# EAGLE board ADXL337 Breakout-Panel-v10 (EAGLE 6.5.0), part 1 of 2
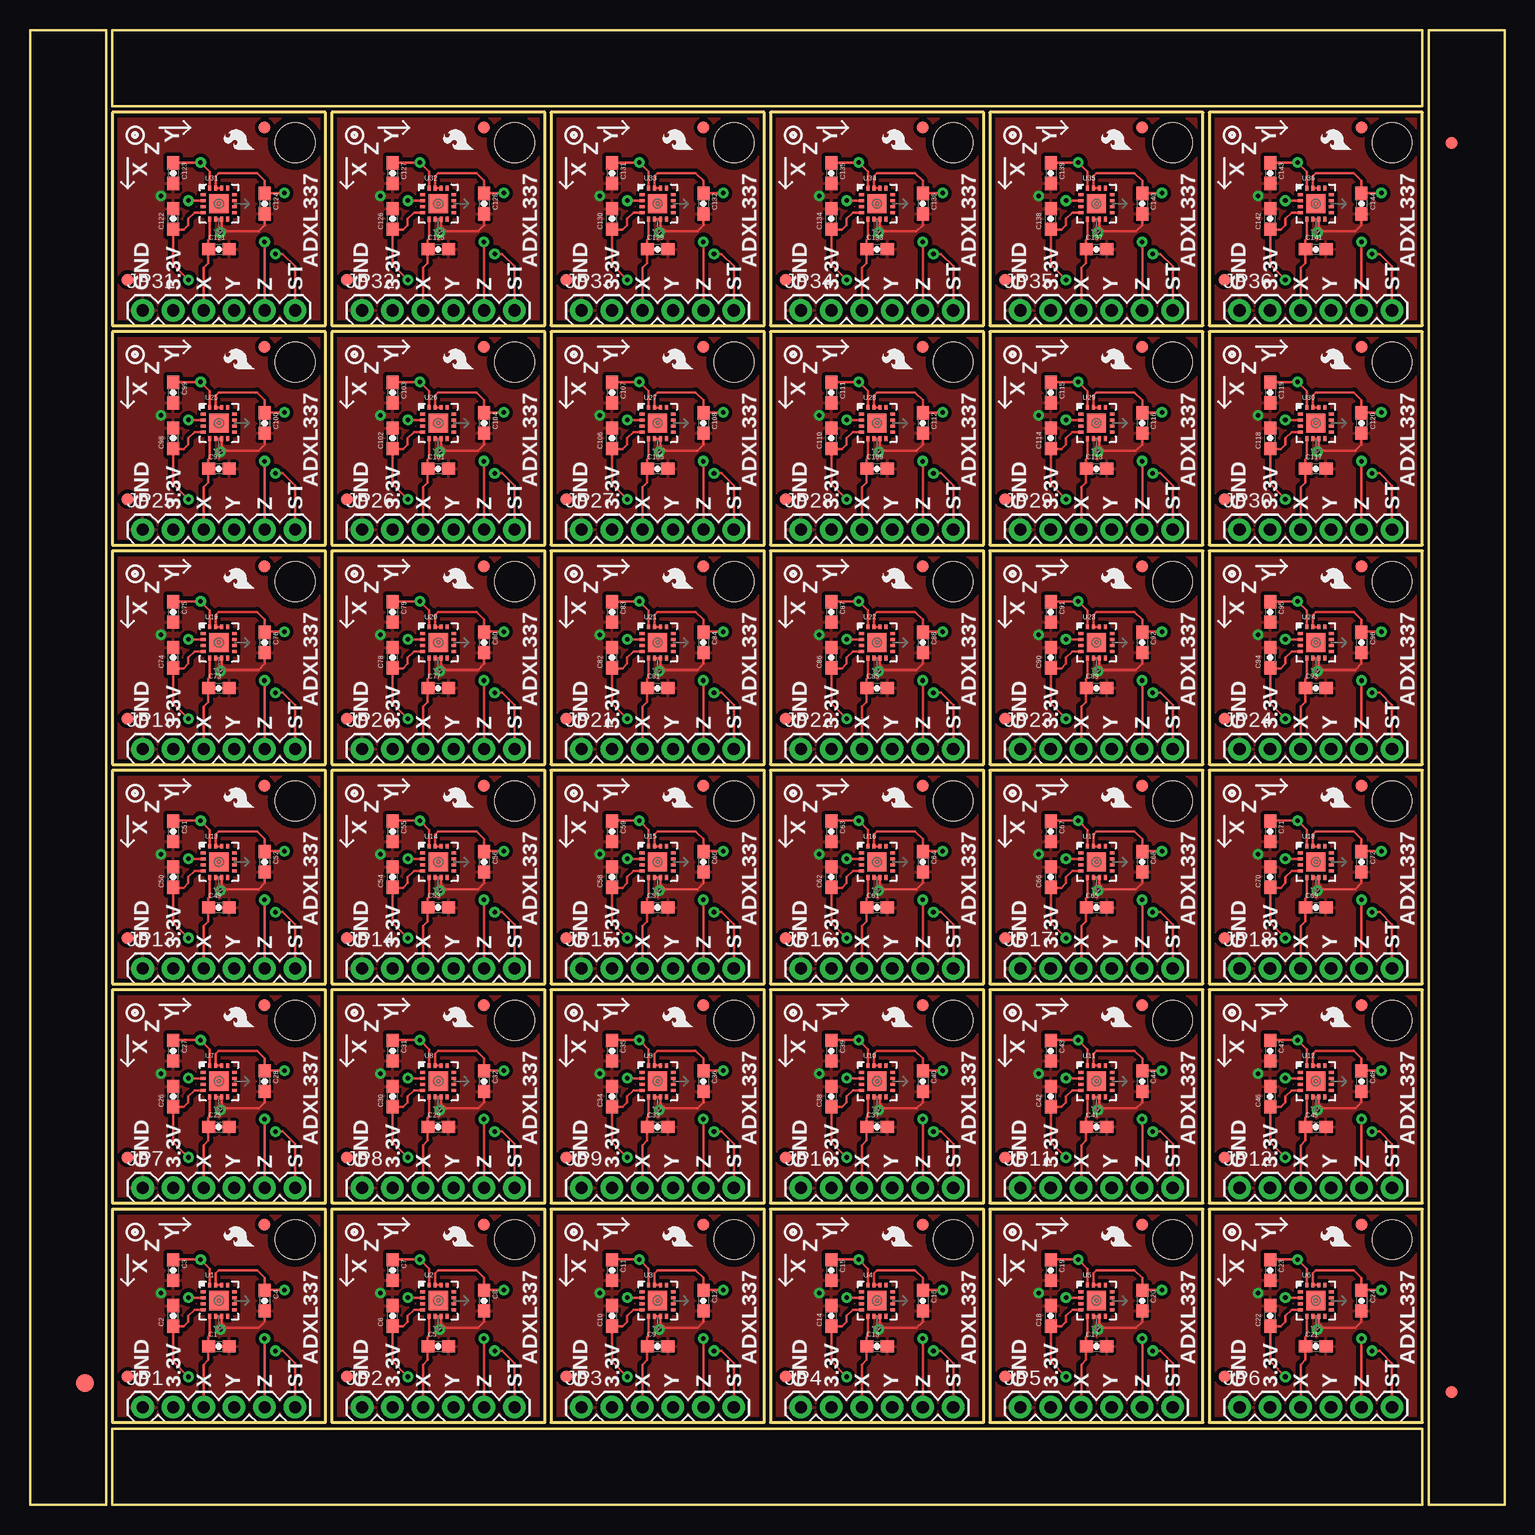
[diagram p0: board, top side]
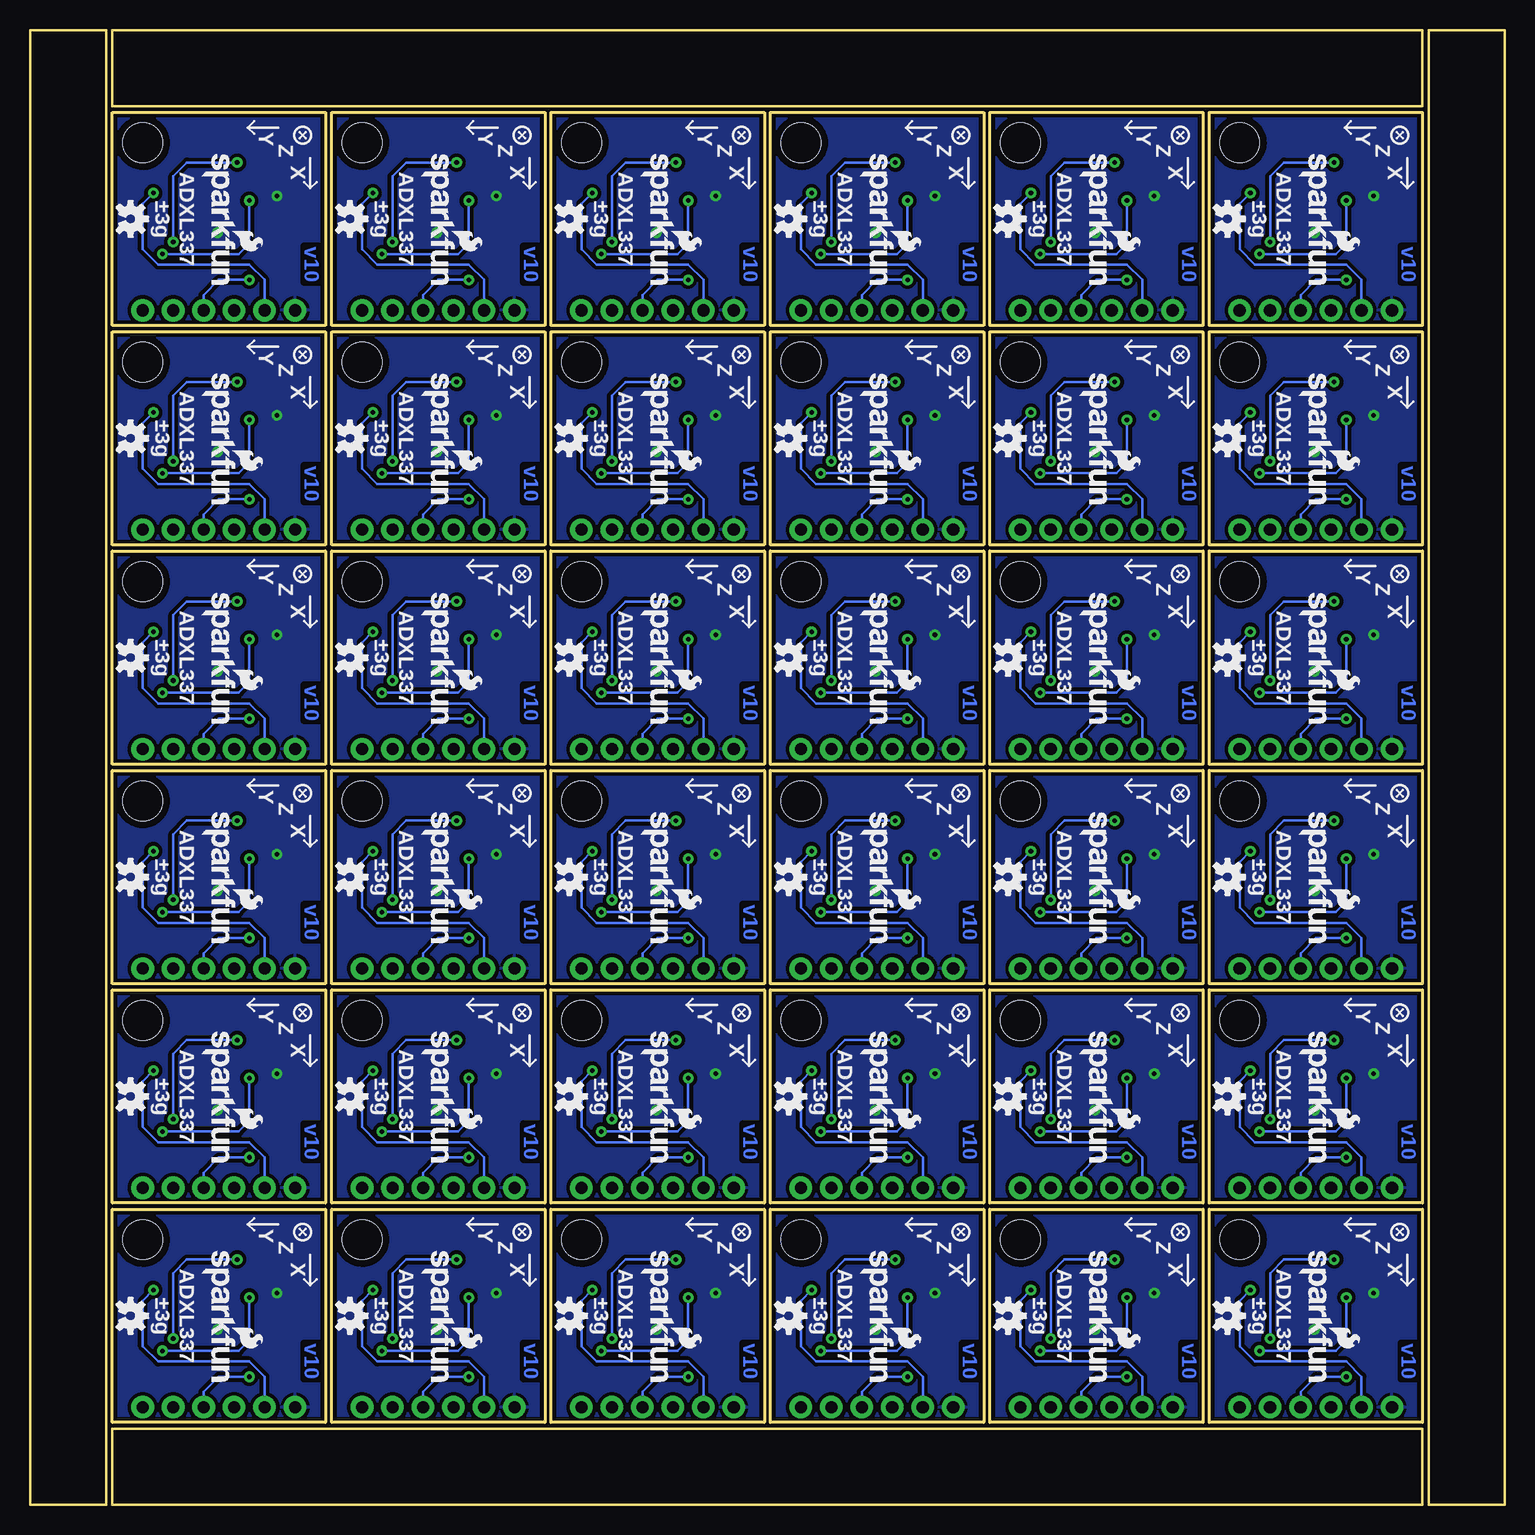
[diagram p1: board, bottom side, seen from below]

Size 122.94 x 122.94 mm. Coordinates in mm from the lower left corner, seen from the top.
Outline: 6.86,6.86 24.64,6.86 24.64,24.64 6.86,24.64 6.86,6.86
Outline: 25.15,6.86 42.93,6.86 42.93,24.64 25.15,24.64 25.15,6.86
Outline: 43.43,6.86 61.21,6.86 61.21,24.64 43.43,24.64 43.43,6.86
Outline: 61.72,6.86 79.5,6.86 79.5,24.64 61.72,24.64 61.72,6.86
Outline: 80.01,6.86 97.79,6.86 97.79,24.64 80.01,24.64 80.01,6.86
Outline: 98.3,6.86 116.08,6.86 116.08,24.64 98.3,24.64 98.3,6.86
Outline: 6.86,25.15 24.64,25.15 24.64,42.93 6.86,42.93 6.86,25.15
Outline: 25.15,25.15 42.93,25.15 42.93,42.93 25.15,42.93 25.15,25.15
Outline: 43.43,25.15 61.21,25.15 61.21,42.93 43.43,42.93 43.43,25.15
Outline: 61.72,25.15 79.5,25.15 79.5,42.93 61.72,42.93 61.72,25.15
Outline: 80.01,25.15 97.79,25.15 97.79,42.93 80.01,42.93 80.01,25.15
Outline: 98.3,25.15 116.08,25.15 116.08,42.93 98.3,42.93 98.3,25.15
Outline: 6.86,43.43 24.64,43.43 24.64,61.21 6.86,61.21 6.86,43.43
Outline: 25.15,43.43 42.93,43.43 42.93,61.21 25.15,61.21 25.15,43.43
Outline: 43.43,43.43 61.21,43.43 61.21,61.21 43.43,61.21 43.43,43.43
Outline: 61.72,43.43 79.5,43.43 79.5,61.21 61.72,61.21 61.72,43.43
Outline: 80.01,43.43 97.79,43.43 97.79,61.21 80.01,61.21 80.01,43.43
Outline: 98.3,43.43 116.08,43.43 116.08,61.21 98.3,61.21 98.3,43.43
Outline: 6.86,61.72 24.64,61.72 24.64,79.5 6.86,79.5 6.86,61.72
Outline: 25.15,61.72 42.93,61.72 42.93,79.5 25.15,79.5 25.15,61.72
Outline: 43.43,61.72 61.21,61.72 61.21,79.5 43.43,79.5 43.43,61.72
Outline: 61.72,61.72 79.5,61.72 79.5,79.5 61.72,79.5 61.72,61.72
Outline: 80.01,61.72 97.79,61.72 97.79,79.5 80.01,79.5 80.01,61.72
Outline: 98.3,61.72 116.08,61.72 116.08,79.5 98.3,79.5 98.3,61.72
Outline: 6.86,80.01 24.64,80.01 24.64,97.79 6.86,97.79 6.86,80.01
Outline: 25.15,80.01 42.93,80.01 42.93,97.79 25.15,97.79 25.15,80.01
Outline: 43.43,80.01 61.21,80.01 61.21,97.79 43.43,97.79 43.43,80.01
Outline: 61.72,80.01 79.5,80.01 79.5,97.79 61.72,97.79 61.72,80.01
Outline: 80.01,80.01 97.79,80.01 97.79,97.79 80.01,97.79 80.01,80.01
Outline: 98.3,80.01 116.08,80.01 116.08,97.79 98.3,97.79 98.3,80.01
Outline: 6.86,98.3 24.64,98.3 24.64,116.08 6.86,116.08 6.86,98.3
Outline: 25.15,98.3 42.93,98.3 42.93,116.08 25.15,116.08 25.15,98.3
Outline: 43.43,98.3 61.21,98.3 61.21,116.08 43.43,116.08 43.43,98.3
Outline: 61.72,98.3 79.5,98.3 79.5,116.08 61.72,116.08 61.72,98.3
Outline: 80.01,98.3 97.79,98.3 97.79,116.08 80.01,116.08 80.01,98.3
Outline: 98.3,98.3 116.08,98.3 116.08,116.08 98.3,116.08 98.3,98.3
Outline: 6.35,0 6.35,122.94 0,122.94 0,0 6.35,0
Outline: 6.86,0 116.08,0 116.08,6.35 6.86,6.35 6.86,0
Outline: 122.94,0 122.94,122.94 116.59,122.94 116.59,0 122.94,0
Outline: 116.08,122.94 6.86,122.94 6.86,116.59 116.08,116.59 116.08,122.94
Copper layers (1*16): Top 0.035mm / dielectric 1.5mm / Bottom 0.035mm
Design rules "SparkFun": minimum track width 8mil, minimum drill 20mil, track to track 8mil, track to pad 8mil, pad to pad 8mil, via to via 8mil, smd to smd 8mil, copper to edge 8mil, drill to drill 8mil, minimum pad ring 12mil, minimum via ring 10mil, stop-mask expansion 4mil, vias tented up to drill 20mil, thermal gap 10mil

## Footprints (pad centres in the part's own frame; a part is rotated, then mirrored left to right if it is on the bottom)
0603-CAP = smd 1.1 x 1: 1 -0.85,0; 2 0.85,0
FIDUCIAL-1.5X3 = smd 1.5 x 1.5: 1 0,0
FIDUCIAL-1X2 = smd 1 x 1: 1 0,0
1X06 = drill 1.016 pad 1.88: 1 0,0; 2 2.54,0; 3 5.08,0; 4 7.62,0; 5 10.16,0; 6 12.7,0
STAND-OFF = hole 3.302: 0,0
LFCSP_LQ-16 = smd 0.4 x 0.25: 1 -1.3,0.75; 2 -1.3,0.25; 3 -1.3,-0.25; 4 -1.3,-0.75; 9 1.3,-0.75; 10 1.3,-0.25; 11 1.3,0.25; 12 1.3,0.75 | smd 0.25 x 0.4: 5 -0.75,-1.3; 6 -0.25,-1.3; 7 0.25,-1.3; 8 0.75,-1.3; 13 0.75,1.3; 14 0.25,1.3; 15 -0.25,1.3; 16 -0.75,1.3 | smd 1.6 x 1.6: EXP 0,0

## Placement (x,y rotation side)
C1  10nF  [0603-CAP]  15.75,13.21 0 top
C2  10nF  [0603-CAP]  11.94,15.75 90 top
C3  10nF  [0603-CAP]  11.94,19.56 270 top
C4  0.1uF  [0603-CAP]  19.56,17.02 270 top
C5  10nF  [0603-CAP]  34.04,13.21 0 top
C6  10nF  [0603-CAP]  30.23,15.75 90 top
C7  10nF  [0603-CAP]  30.23,19.56 270 top
C8  0.1uF  [0603-CAP]  37.85,17.02 270 top
C9  10nF  [0603-CAP]  52.32,13.21 0 top
C10  10nF  [0603-CAP]  48.51,15.75 90 top
C11  10nF  [0603-CAP]  48.51,19.56 270 top
C12  0.1uF  [0603-CAP]  56.13,17.02 270 top
C13  10nF  [0603-CAP]  70.61,13.21 0 top
C14  10nF  [0603-CAP]  66.8,15.75 90 top
C15  10nF  [0603-CAP]  66.8,19.56 270 top
C16  0.1uF  [0603-CAP]  74.42,17.02 270 top
C17  10nF  [0603-CAP]  88.9,13.21 0 top
C18  10nF  [0603-CAP]  85.09,15.75 90 top
C19  10nF  [0603-CAP]  85.09,19.56 270 top
C20  0.1uF  [0603-CAP]  92.71,17.02 270 top
C21  10nF  [0603-CAP]  107.19,13.21 0 top
C22  10nF  [0603-CAP]  103.38,15.75 90 top
C23  10nF  [0603-CAP]  103.38,19.56 270 top
C24  0.1uF  [0603-CAP]  111,17.02 270 top
C25  10nF  [0603-CAP]  15.75,31.5 0 top
C26  10nF  [0603-CAP]  11.94,34.04 90 top
C27  10nF  [0603-CAP]  11.94,37.85 270 top
C28  0.1uF  [0603-CAP]  19.56,35.31 270 top
C29  10nF  [0603-CAP]  34.04,31.5 0 top
C30  10nF  [0603-CAP]  30.23,34.04 90 top
C31  10nF  [0603-CAP]  30.23,37.85 270 top
C32  0.1uF  [0603-CAP]  37.85,35.31 270 top
C33  10nF  [0603-CAP]  52.32,31.5 0 top
C34  10nF  [0603-CAP]  48.51,34.04 90 top
C35  10nF  [0603-CAP]  48.51,37.85 270 top
C36  0.1uF  [0603-CAP]  56.13,35.31 270 top
C37  10nF  [0603-CAP]  70.61,31.5 0 top
C38  10nF  [0603-CAP]  66.8,34.04 90 top
C39  10nF  [0603-CAP]  66.8,37.85 270 top
C40  0.1uF  [0603-CAP]  74.42,35.31 270 top
C41  10nF  [0603-CAP]  88.9,31.5 0 top
C42  10nF  [0603-CAP]  85.09,34.04 90 top
C43  10nF  [0603-CAP]  85.09,37.85 270 top
C44  0.1uF  [0603-CAP]  92.71,35.31 270 top
C45  10nF  [0603-CAP]  107.19,31.5 0 top
C46  10nF  [0603-CAP]  103.38,34.04 90 top
C47  10nF  [0603-CAP]  103.38,37.85 270 top
C48  0.1uF  [0603-CAP]  111,35.31 270 top
C49  10nF  [0603-CAP]  15.75,49.78 0 top
C50  10nF  [0603-CAP]  11.94,52.32 90 top
C51  10nF  [0603-CAP]  11.94,56.13 270 top
C52  0.1uF  [0603-CAP]  19.56,53.59 270 top
C53  10nF  [0603-CAP]  34.04,49.78 0 top
C54  10nF  [0603-CAP]  30.23,52.32 90 top
C55  10nF  [0603-CAP]  30.23,56.13 270 top
C56  0.1uF  [0603-CAP]  37.85,53.59 270 top
C57  10nF  [0603-CAP]  52.32,49.78 0 top
C58  10nF  [0603-CAP]  48.51,52.32 90 top
C59  10nF  [0603-CAP]  48.51,56.13 270 top
C60  0.1uF  [0603-CAP]  56.13,53.59 270 top
C61  10nF  [0603-CAP]  70.61,49.78 0 top
C62  10nF  [0603-CAP]  66.8,52.32 90 top
C63  10nF  [0603-CAP]  66.8,56.13 270 top
C64  0.1uF  [0603-CAP]  74.42,53.59 270 top
C65  10nF  [0603-CAP]  88.9,49.78 0 top
C66  10nF  [0603-CAP]  85.09,52.32 90 top
C67  10nF  [0603-CAP]  85.09,56.13 270 top
C68  0.1uF  [0603-CAP]  92.71,53.59 270 top
C69  10nF  [0603-CAP]  107.19,49.78 0 top
C70  10nF  [0603-CAP]  103.38,52.32 90 top
C71  10nF  [0603-CAP]  103.38,56.13 270 top
C72  0.1uF  [0603-CAP]  111,53.59 270 top
C73  10nF  [0603-CAP]  15.75,68.07 0 top
C74  10nF  [0603-CAP]  11.94,70.61 90 top
C75  10nF  [0603-CAP]  11.94,74.42 270 top
C76  0.1uF  [0603-CAP]  19.56,71.88 270 top
C77  10nF  [0603-CAP]  34.04,68.07 0 top
C78  10nF  [0603-CAP]  30.23,70.61 90 top
C79  10nF  [0603-CAP]  30.23,74.42 270 top
C80  0.1uF  [0603-CAP]  37.85,71.88 270 top
C81  10nF  [0603-CAP]  52.32,68.07 0 top
C82  10nF  [0603-CAP]  48.51,70.61 90 top
C83  10nF  [0603-CAP]  48.51,74.42 270 top
C84  0.1uF  [0603-CAP]  56.13,71.88 270 top
C85  10nF  [0603-CAP]  70.61,68.07 0 top
C86  10nF  [0603-CAP]  66.8,70.61 90 top
C87  10nF  [0603-CAP]  66.8,74.42 270 top
C88  0.1uF  [0603-CAP]  74.42,71.88 270 top
C89  10nF  [0603-CAP]  88.9,68.07 0 top
C90  10nF  [0603-CAP]  85.09,70.61 90 top
C91  10nF  [0603-CAP]  85.09,74.42 270 top
C92  0.1uF  [0603-CAP]  92.71,71.88 270 top
C93  10nF  [0603-CAP]  107.19,68.07 0 top
C94  10nF  [0603-CAP]  103.38,70.61 90 top
C95  10nF  [0603-CAP]  103.38,74.42 270 top
C96  0.1uF  [0603-CAP]  111,71.88 270 top
C97  10nF  [0603-CAP]  15.75,86.36 0 top
C98  10nF  [0603-CAP]  11.94,88.9 90 top
C99  10nF  [0603-CAP]  11.94,92.71 270 top
C100  0.1uF  [0603-CAP]  19.56,90.17 270 top
C101  10nF  [0603-CAP]  34.04,86.36 0 top
C102  10nF  [0603-CAP]  30.23,88.9 90 top
C103  10nF  [0603-CAP]  30.23,92.71 270 top
C104  0.1uF  [0603-CAP]  37.85,90.17 270 top
C105  10nF  [0603-CAP]  52.32,86.36 0 top
C106  10nF  [0603-CAP]  48.51,88.9 90 top
C107  10nF  [0603-CAP]  48.51,92.71 270 top
C108  0.1uF  [0603-CAP]  56.13,90.17 270 top
C109  10nF  [0603-CAP]  70.61,86.36 0 top
C110  10nF  [0603-CAP]  66.8,88.9 90 top
C111  10nF  [0603-CAP]  66.8,92.71 270 top
C112  0.1uF  [0603-CAP]  74.42,90.17 270 top
C113  10nF  [0603-CAP]  88.9,86.36 0 top
C114  10nF  [0603-CAP]  85.09,88.9 90 top
C115  10nF  [0603-CAP]  85.09,92.71 270 top
C116  0.1uF  [0603-CAP]  92.71,90.17 270 top
C117  10nF  [0603-CAP]  107.19,86.36 0 top
C118  10nF  [0603-CAP]  103.38,88.9 90 top
C119  10nF  [0603-CAP]  103.38,92.71 270 top
C120  0.1uF  [0603-CAP]  111,90.17 270 top
C121  10nF  [0603-CAP]  15.75,104.65 0 top
C122  10nF  [0603-CAP]  11.94,107.19 90 top
C123  10nF  [0603-CAP]  11.94,111 270 top
C124  0.1uF  [0603-CAP]  19.56,108.46 270 top
C125  10nF  [0603-CAP]  34.04,104.65 0 top
C126  10nF  [0603-CAP]  30.23,107.19 90 top
C127  10nF  [0603-CAP]  30.23,111 270 top
C128  0.1uF  [0603-CAP]  37.85,108.46 270 top
C129  10nF  [0603-CAP]  52.32,104.65 0 top
C130  10nF  [0603-CAP]  48.51,107.19 90 top
C131  10nF  [0603-CAP]  48.51,111 270 top
C132  0.1uF  [0603-CAP]  56.13,108.46 270 top
C133  10nF  [0603-CAP]  70.61,104.65 0 top
C134  10nF  [0603-CAP]  66.8,107.19 90 top
C135  10nF  [0603-CAP]  66.8,111 270 top
C136  0.1uF  [0603-CAP]  74.42,108.46 270 top
C137  10nF  [0603-CAP]  88.9,104.65 0 top
C138  10nF  [0603-CAP]  85.09,107.19 90 top
C139  10nF  [0603-CAP]  85.09,111 270 top
C140  0.1uF  [0603-CAP]  92.71,108.46 270 top
C141  10nF  [0603-CAP]  107.19,104.65 0 top
C142  10nF  [0603-CAP]  103.38,107.19 90 top
C143  10nF  [0603-CAP]  103.38,111 270 top
C144  0.1uF  [0603-CAP]  111,108.46 270 top
E$1  [FIDUCIAL-1.5X3]  4.57,10.16 0 top
E$4  [FIDUCIAL-1X2]  118.49,9.4 0 top
E$6  [FIDUCIAL-1X2]  118.49,113.54 180 top
FID1  FIDUCIAL1X2  [FIDUCIAL-1X2]  19.56,23.37 0 top
FID2  FIDUCIAL1X2  [FIDUCIAL-1X2]  8.13,10.67 0 top
FID3  FIDUCIAL1X2  [FIDUCIAL-1X2]  37.85,23.37 0 top
FID4  FIDUCIAL1X2  [FIDUCIAL-1X2]  26.42,10.67 0 top
FID5  FIDUCIAL1X2  [FIDUCIAL-1X2]  56.13,23.37 0 top
FID6  FIDUCIAL1X2  [FIDUCIAL-1X2]  44.7,10.67 0 top
FID7  FIDUCIAL1X2  [FIDUCIAL-1X2]  74.42,23.37 0 top
FID8  FIDUCIAL1X2  [FIDUCIAL-1X2]  62.99,10.67 0 top
FID9  FIDUCIAL1X2  [FIDUCIAL-1X2]  92.71,23.37 0 top
FID10  FIDUCIAL1X2  [FIDUCIAL-1X2]  81.28,10.67 0 top
FID11  FIDUCIAL1X2  [FIDUCIAL-1X2]  111,23.37 0 top
FID12  FIDUCIAL1X2  [FIDUCIAL-1X2]  99.57,10.67 0 top
FID13  FIDUCIAL1X2  [FIDUCIAL-1X2]  19.56,41.66 0 top
FID14  FIDUCIAL1X2  [FIDUCIAL-1X2]  8.13,28.96 0 top
FID15  FIDUCIAL1X2  [FIDUCIAL-1X2]  37.85,41.66 0 top
FID16  FIDUCIAL1X2  [FIDUCIAL-1X2]  26.42,28.96 0 top
FID17  FIDUCIAL1X2  [FIDUCIAL-1X2]  56.13,41.66 0 top
FID18  FIDUCIAL1X2  [FIDUCIAL-1X2]  44.7,28.96 0 top
FID19  FIDUCIAL1X2  [FIDUCIAL-1X2]  74.42,41.66 0 top
FID20  FIDUCIAL1X2  [FIDUCIAL-1X2]  62.99,28.96 0 top
FID21  FIDUCIAL1X2  [FIDUCIAL-1X2]  92.71,41.66 0 top
FID22  FIDUCIAL1X2  [FIDUCIAL-1X2]  81.28,28.96 0 top
FID23  FIDUCIAL1X2  [FIDUCIAL-1X2]  111,41.66 0 top
FID24  FIDUCIAL1X2  [FIDUCIAL-1X2]  99.57,28.96 0 top
FID25  FIDUCIAL1X2  [FIDUCIAL-1X2]  19.56,59.94 0 top
FID26  FIDUCIAL1X2  [FIDUCIAL-1X2]  8.13,47.24 0 top
FID27  FIDUCIAL1X2  [FIDUCIAL-1X2]  37.85,59.94 0 top
FID28  FIDUCIAL1X2  [FIDUCIAL-1X2]  26.42,47.24 0 top
FID29  FIDUCIAL1X2  [FIDUCIAL-1X2]  56.13,59.94 0 top
FID30  FIDUCIAL1X2  [FIDUCIAL-1X2]  44.7,47.24 0 top
FID31  FIDUCIAL1X2  [FIDUCIAL-1X2]  74.42,59.94 0 top
FID32  FIDUCIAL1X2  [FIDUCIAL-1X2]  62.99,47.24 0 top
FID33  FIDUCIAL1X2  [FIDUCIAL-1X2]  92.71,59.94 0 top
FID34  FIDUCIAL1X2  [FIDUCIAL-1X2]  81.28,47.24 0 top
FID35  FIDUCIAL1X2  [FIDUCIAL-1X2]  111,59.94 0 top
FID36  FIDUCIAL1X2  [FIDUCIAL-1X2]  99.57,47.24 0 top
FID37  FIDUCIAL1X2  [FIDUCIAL-1X2]  19.56,78.23 0 top
FID38  FIDUCIAL1X2  [FIDUCIAL-1X2]  8.13,65.53 0 top
FID39  FIDUCIAL1X2  [FIDUCIAL-1X2]  37.85,78.23 0 top
FID40  FIDUCIAL1X2  [FIDUCIAL-1X2]  26.42,65.53 0 top
FID41  FIDUCIAL1X2  [FIDUCIAL-1X2]  56.13,78.23 0 top
FID42  FIDUCIAL1X2  [FIDUCIAL-1X2]  44.7,65.53 0 top
FID43  FIDUCIAL1X2  [FIDUCIAL-1X2]  74.42,78.23 0 top
FID44  FIDUCIAL1X2  [FIDUCIAL-1X2]  62.99,65.53 0 top
FID45  FIDUCIAL1X2  [FIDUCIAL-1X2]  92.71,78.23 0 top
FID46  FIDUCIAL1X2  [FIDUCIAL-1X2]  81.28,65.53 0 top
FID47  FIDUCIAL1X2  [FIDUCIAL-1X2]  111,78.23 0 top
FID48  FIDUCIAL1X2  [FIDUCIAL-1X2]  99.57,65.53 0 top
FID49  FIDUCIAL1X2  [FIDUCIAL-1X2]  19.56,96.52 0 top
FID50  FIDUCIAL1X2  [FIDUCIAL-1X2]  8.13,83.82 0 top
FID51  FIDUCIAL1X2  [FIDUCIAL-1X2]  37.85,96.52 0 top
FID52  FIDUCIAL1X2  [FIDUCIAL-1X2]  26.42,83.82 0 top
FID53  FIDUCIAL1X2  [FIDUCIAL-1X2]  56.13,96.52 0 top
FID54  FIDUCIAL1X2  [FIDUCIAL-1X2]  44.7,83.82 0 top
FID55  FIDUCIAL1X2  [FIDUCIAL-1X2]  74.42,96.52 0 top
FID56  FIDUCIAL1X2  [FIDUCIAL-1X2]  62.99,83.82 0 top
FID57  FIDUCIAL1X2  [FIDUCIAL-1X2]  92.71,96.52 0 top
FID58  FIDUCIAL1X2  [FIDUCIAL-1X2]  81.28,83.82 0 top
FID59  FIDUCIAL1X2  [FIDUCIAL-1X2]  111,96.52 0 top
FID60  FIDUCIAL1X2  [FIDUCIAL-1X2]  99.57,83.82 0 top
FID61  FIDUCIAL1X2  [FIDUCIAL-1X2]  19.56,114.81 0 top
FID62  FIDUCIAL1X2  [FIDUCIAL-1X2]  8.13,102.11 0 top
FID63  FIDUCIAL1X2  [FIDUCIAL-1X2]  37.85,114.81 0 top
FID64  FIDUCIAL1X2  [FIDUCIAL-1X2]  26.42,102.11 0 top
FID65  FIDUCIAL1X2  [FIDUCIAL-1X2]  56.13,114.81 0 top
FID66  FIDUCIAL1X2  [FIDUCIAL-1X2]  44.7,102.11 0 top
FID67  FIDUCIAL1X2  [FIDUCIAL-1X2]  74.42,114.81 0 top
FID68  FIDUCIAL1X2  [FIDUCIAL-1X2]  62.99,102.11 0 top
FID69  FIDUCIAL1X2  [FIDUCIAL-1X2]  92.71,114.81 0 top
FID70  FIDUCIAL1X2  [FIDUCIAL-1X2]  81.28,102.11 0 top
FID71  FIDUCIAL1X2  [FIDUCIAL-1X2]  111,114.81 0 top
FID72  FIDUCIAL1X2  [FIDUCIAL-1X2]  99.57,102.11 0 top
JP1  [1X06]  9.4,8.13 0 top
JP2  [1X06]  27.69,8.13 0 top
JP3  [1X06]  45.97,8.13 0 top
JP4  [1X06]  64.26,8.13 0 top
JP5  [1X06]  82.55,8.13 0 top
JP6  [1X06]  100.84,8.13 0 top
JP7  [1X06]  9.4,26.42 0 top
JP8  [1X06]  27.69,26.42 0 top
JP9  [1X06]  45.97,26.42 0 top
JP10  [1X06]  64.26,26.42 0 top
JP11  [1X06]  82.55,26.42 0 top
JP12  [1X06]  100.84,26.42 0 top
JP13  [1X06]  9.4,44.7 0 top
JP14  [1X06]  27.69,44.7 0 top
JP15  [1X06]  45.97,44.7 0 top
JP16  [1X06]  64.26,44.7 0 top
JP17  [1X06]  82.55,44.7 0 top
JP18  [1X06]  100.84,44.7 0 top
JP19  [1X06]  9.4,62.99 0 top
JP20  [1X06]  27.69,62.99 0 top
JP21  [1X06]  45.97,62.99 0 top
JP22  [1X06]  64.26,62.99 0 top
JP23  [1X06]  82.55,62.99 0 top
JP24  [1X06]  100.84,62.99 0 top
JP25  [1X06]  9.4,81.28 0 top
JP26  [1X06]  27.69,81.28 0 top
JP27  [1X06]  45.97,81.28 0 top
JP28  [1X06]  64.26,81.28 0 top
JP29  [1X06]  82.55,81.28 0 top
JP30  [1X06]  100.84,81.28 0 top
JP31  [1X06]  9.4,99.57 0 top
JP32  [1X06]  27.69,99.57 0 top
JP33  [1X06]  45.97,99.57 0 top
JP34  [1X06]  64.26,99.57 0 top
JP35  [1X06]  82.55,99.57 0 top
JP36  [1X06]  100.84,99.57 0 top
LOGO1  SFE_LOGO_FLAME.1_INCH  [SFE_LOGO_FLAME_.1]  19.05,21.21 90 top
LOGO2  OSHW-LOGOS  [OSHW-LOGO-S]  23.11,15.75 270 bottom
LOGO3  SFE_LOGO_NAME_FLAME.1_INCH  [SFE_LOGO_NAME_FLAME_.1]  17.27,21.59 270 bottom
LOGO4  SFE_LOGO_FLAME.1_INCH  [SFE_LOGO_FLAME_.1]  37.34,21.21 90 top
LOGO5  OSHW-LOGOS  [OSHW-LOGO-S]  41.4,15.75 270 bottom
LOGO6  SFE_LOGO_NAME_FLAME.1_INCH  [SFE_LOGO_NAME_FLAME_.1]  35.56,21.59 270 bottom
LOGO7  SFE_LOGO_FLAME.1_INCH  [SFE_LOGO_FLAME_.1]  55.63,21.21 90 top
LOGO8  OSHW-LOGOS  [OSHW-LOGO-S]  59.69,15.75 270 bottom
LOGO9  SFE_LOGO_NAME_FLAME.1_INCH  [SFE_LOGO_NAME_FLAME_.1]  53.85,21.59 270 bottom
LOGO10  SFE_LOGO_FLAME.1_INCH  [SFE_LOGO_FLAME_.1]  73.91,21.21 90 top
LOGO11  OSHW-LOGOS  [OSHW-LOGO-S]  77.98,15.75 270 bottom
LOGO12  SFE_LOGO_NAME_FLAME.1_INCH  [SFE_LOGO_NAME_FLAME_.1]  72.14,21.59 270 bottom
LOGO13  SFE_LOGO_FLAME.1_INCH  [SFE_LOGO_FLAME_.1]  92.2,21.21 90 top
LOGO14  OSHW-LOGOS  [OSHW-LOGO-S]  96.27,15.75 270 bottom
LOGO15  SFE_LOGO_NAME_FLAME.1_INCH  [SFE_LOGO_NAME_FLAME_.1]  90.42,21.59 270 bottom
LOGO16  SFE_LOGO_FLAME.1_INCH  [SFE_LOGO_FLAME_.1]  110.49,21.21 90 top
LOGO17  OSHW-LOGOS  [OSHW-LOGO-S]  114.55,15.75 270 bottom
LOGO18  SFE_LOGO_NAME_FLAME.1_INCH  [SFE_LOGO_NAME_FLAME_.1]  108.71,21.59 270 bottom
LOGO19  SFE_LOGO_FLAME.1_INCH  [SFE_LOGO_FLAME_.1]  19.05,39.5 90 top
LOGO20  OSHW-LOGOS  [OSHW-LOGO-S]  23.11,34.04 270 bottom
LOGO21  SFE_LOGO_NAME_FLAME.1_INCH  [SFE_LOGO_NAME_FLAME_.1]  17.27,39.88 270 bottom
LOGO22  SFE_LOGO_FLAME.1_INCH  [SFE_LOGO_FLAME_.1]  37.34,39.5 90 top
LOGO23  OSHW-LOGOS  [OSHW-LOGO-S]  41.4,34.04 270 bottom
LOGO24  SFE_LOGO_NAME_FLAME.1_INCH  [SFE_LOGO_NAME_FLAME_.1]  35.56,39.88 270 bottom
LOGO25  SFE_LOGO_FLAME.1_INCH  [SFE_LOGO_FLAME_.1]  55.63,39.5 90 top
LOGO26  OSHW-LOGOS  [OSHW-LOGO-S]  59.69,34.04 270 bottom
LOGO27  SFE_LOGO_NAME_FLAME.1_INCH  [SFE_LOGO_NAME_FLAME_.1]  53.85,39.88 270 bottom
LOGO28  SFE_LOGO_FLAME.1_INCH  [SFE_LOGO_FLAME_.1]  73.91,39.5 90 top
LOGO29  OSHW-LOGOS  [OSHW-LOGO-S]  77.98,34.04 270 bottom
LOGO30  SFE_LOGO_NAME_FLAME.1_INCH  [SFE_LOGO_NAME_FLAME_.1]  72.14,39.88 270 bottom
LOGO31  SFE_LOGO_FLAME.1_INCH  [SFE_LOGO_FLAME_.1]  92.2,39.5 90 top
LOGO32  OSHW-LOGOS  [OSHW-LOGO-S]  96.27,34.04 270 bottom
LOGO33  SFE_LOGO_NAME_FLAME.1_INCH  [SFE_LOGO_NAME_FLAME_.1]  90.42,39.88 270 bottom
LOGO34  SFE_LOGO_FLAME.1_INCH  [SFE_LOGO_FLAME_.1]  110.49,39.5 90 top
LOGO35  OSHW-LOGOS  [OSHW-LOGO-S]  114.55,34.04 270 bottom
LOGO36  SFE_LOGO_NAME_FLAME.1_INCH  [SFE_LOGO_NAME_FLAME_.1]  108.71,39.88 270 bottom
LOGO37  SFE_LOGO_FLAME.1_INCH  [SFE_LOGO_FLAME_.1]  19.05,57.78 90 top
LOGO38  OSHW-LOGOS  [OSHW-LOGO-S]  23.11,52.32 270 bottom
LOGO39  SFE_LOGO_NAME_FLAME.1_INCH  [SFE_LOGO_NAME_FLAME_.1]  17.27,58.17 270 bottom
LOGO40  SFE_LOGO_FLAME.1_INCH  [SFE_LOGO_FLAME_.1]  37.34,57.78 90 top
LOGO41  OSHW-LOGOS  [OSHW-LOGO-S]  41.4,52.32 270 bottom
LOGO42  SFE_LOGO_NAME_FLAME.1_INCH  [SFE_LOGO_NAME_FLAME_.1]  35.56,58.17 270 bottom
LOGO43  SFE_LOGO_FLAME.1_INCH  [SFE_LOGO_FLAME_.1]  55.63,57.78 90 top
LOGO44  OSHW-LOGOS  [OSHW-LOGO-S]  59.69,52.32 270 bottom
LOGO45  SFE_LOGO_NAME_FLAME.1_INCH  [SFE_LOGO_NAME_FLAME_.1]  53.85,58.17 270 bottom
LOGO46  SFE_LOGO_FLAME.1_INCH  [SFE_LOGO_FLAME_.1]  73.91,57.78 90 top
LOGO47  OSHW-LOGOS  [OSHW-LOGO-S]  77.98,52.32 270 bottom
LOGO48  SFE_LOGO_NAME_FLAME.1_INCH  [SFE_LOGO_NAME_FLAME_.1]  72.14,58.17 270 bottom
LOGO49  SFE_LOGO_FLAME.1_INCH  [SFE_LOGO_FLAME_.1]  92.2,57.78 90 top
LOGO50  OSHW-LOGOS  [OSHW-LOGO-S]  96.27,52.32 270 bottom
LOGO51  SFE_LOGO_NAME_FLAME.1_INCH  [SFE_LOGO_NAME_FLAME_.1]  90.42,58.17 270 bottom
LOGO52  SFE_LOGO_FLAME.1_INCH  [SFE_LOGO_FLAME_.1]  110.49,57.78 90 top
LOGO53  OSHW-LOGOS  [OSHW-LOGO-S]  114.55,52.32 270 bottom
LOGO54  SFE_LOGO_NAME_FLAME.1_INCH  [SFE_LOGO_NAME_FLAME_.1]  108.71,58.17 270 bottom
LOGO55  SFE_LOGO_FLAME.1_INCH  [SFE_LOGO_FLAME_.1]  19.05,76.07 90 top
LOGO56  OSHW-LOGOS  [OSHW-LOGO-S]  23.11,70.61 270 bottom
LOGO57  SFE_LOGO_NAME_FLAME.1_INCH  [SFE_LOGO_NAME_FLAME_.1]  17.27,76.45 270 bottom
LOGO58  SFE_LOGO_FLAME.1_INCH  [SFE_LOGO_FLAME_.1]  37.34,76.07 90 top
LOGO59  OSHW-LOGOS  [OSHW-LOGO-S]  41.4,70.61 270 bottom
LOGO60  SFE_LOGO_NAME_FLAME.1_INCH  [SFE_LOGO_NAME_FLAME_.1]  35.56,76.45 270 bottom
LOGO61  SFE_LOGO_FLAME.1_INCH  [SFE_LOGO_FLAME_.1]  55.63,76.07 90 top
LOGO62  OSHW-LOGOS  [OSHW-LOGO-S]  59.69,70.61 270 bottom
LOGO63  SFE_LOGO_NAME_FLAME.1_INCH  [SFE_LOGO_NAME_FLAME_.1]  53.85,76.45 270 bottom
LOGO64  SFE_LOGO_FLAME.1_INCH  [SFE_LOGO_FLAME_.1]  73.91,76.07 90 top
LOGO65  OSHW-LOGOS  [OSHW-LOGO-S]  77.98,70.61 270 bottom
LOGO66  SFE_LOGO_NAME_FLAME.1_INCH  [SFE_LOGO_NAME_FLAME_.1]  72.14,76.45 270 bottom
LOGO67  SFE_LOGO_FLAME.1_INCH  [SFE_LOGO_FLAME_.1]  92.2,76.07 90 top
LOGO68  OSHW-LOGOS  [OSHW-LOGO-S]  96.27,70.61 270 bottom
LOGO69  SFE_LOGO_NAME_FLAME.1_INCH  [SFE_LOGO_NAME_FLAME_.1]  90.42,76.45 270 bottom
LOGO70  SFE_LOGO_FLAME.1_INCH  [SFE_LOGO_FLAME_.1]  110.49,76.07 90 top
LOGO71  OSHW-LOGOS  [OSHW-LOGO-S]  114.55,70.61 270 bottom
LOGO72  SFE_LOGO_NAME_FLAME.1_INCH  [SFE_LOGO_NAME_FLAME_.1]  108.71,76.45 270 bottom
LOGO73  SFE_LOGO_FLAME.1_INCH  [SFE_LOGO_FLAME_.1]  19.05,94.36 90 top
LOGO74  OSHW-LOGOS  [OSHW-LOGO-S]  23.11,88.9 270 bottom
LOGO75  SFE_LOGO_NAME_FLAME.1_INCH  [SFE_LOGO_NAME_FLAME_.1]  17.27,94.74 270 bottom
LOGO76  SFE_LOGO_FLAME.1_INCH  [SFE_LOGO_FLAME_.1]  37.34,94.36 90 top
LOGO77  OSHW-LOGOS  [OSHW-LOGO-S]  41.4,88.9 270 bottom
LOGO78  SFE_LOGO_NAME_FLAME.1_INCH  [SFE_LOGO_NAME_FLAME_.1]  35.56,94.74 270 bottom
LOGO79  SFE_LOGO_FLAME.1_INCH  [SFE_LOGO_FLAME_.1]  55.63,94.36 90 top
LOGO80  OSHW-LOGOS  [OSHW-LOGO-S]  59.69,88.9 270 bottom
LOGO81  SFE_LOGO_NAME_FLAME.1_INCH  [SFE_LOGO_NAME_FLAME_.1]  53.85,94.74 270 bottom
LOGO82  SFE_LOGO_FLAME.1_INCH  [SFE_LOGO_FLAME_.1]  73.91,94.36 90 top
LOGO83  OSHW-LOGOS  [OSHW-LOGO-S]  77.98,88.9 270 bottom
LOGO84  SFE_LOGO_NAME_FLAME.1_INCH  [SFE_LOGO_NAME_FLAME_.1]  72.14,94.74 270 bottom
LOGO85  SFE_LOGO_FLAME.1_INCH  [SFE_LOGO_FLAME_.1]  92.2,94.36 90 top
LOGO86  OSHW-LOGOS  [OSHW-LOGO-S]  96.27,88.9 270 bottom
LOGO87  SFE_LOGO_NAME_FLAME.1_INCH  [SFE_LOGO_NAME_FLAME_.1]  90.42,94.74 270 bottom
LOGO88  SFE_LOGO_FLAME.1_INCH  [SFE_LOGO_FLAME_.1]  110.49,94.36 90 top
LOGO89  OSHW-LOGOS  [OSHW-LOGO-S]  114.55,88.9 270 bottom
LOGO90  SFE_LOGO_NAME_FLAME.1_INCH  [SFE_LOGO_NAME_FLAME_.1]  108.71,94.74 270 bottom
LOGO91  SFE_LOGO_FLAME.1_INCH  [SFE_LOGO_FLAME_.1]  19.05,112.65 90 top
LOGO92  OSHW-LOGOS  [OSHW-LOGO-S]  23.11,107.19 270 bottom
LOGO93  SFE_LOGO_NAME_FLAME.1_INCH  [SFE_LOGO_NAME_FLAME_.1]  17.27,113.03 270 bottom
LOGO94  SFE_LOGO_FLAME.1_INCH  [SFE_LOGO_FLAME_.1]  37.34,112.65 90 top
LOGO95  OSHW-LOGOS  [OSHW-LOGO-S]  41.4,107.19 270 bottom
LOGO96  SFE_LOGO_NAME_FLAME.1_INCH  [SFE_LOGO_NAME_FLAME_.1]  35.56,113.03 270 bottom
LOGO97  SFE_LOGO_FLAME.1_INCH  [SFE_LOGO_FLAME_.1]  55.63,112.65 90 top
LOGO98  OSHW-LOGOS  [OSHW-LOGO-S]  59.69,107.19 270 bottom
LOGO99  SFE_LOGO_NAME_FLAME.1_INCH  [SFE_LOGO_NAME_FLAME_.1]  53.85,113.03 270 bottom
LOGO100  SFE_LOGO_FLAME.1_INCH  [SFE_LOGO_FLAME_.1]  73.91,112.65 90 top
LOGO101  OSHW-LOGOS  [OSHW-LOGO-S]  77.98,107.19 270 bottom
LOGO102  SFE_LOGO_NAME_FLAME.1_INCH  [SFE_LOGO_NAME_FLAME_.1]  72.14,113.03 270 bottom
LOGO103  SFE_LOGO_FLAME.1_INCH  [SFE_LOGO_FLAME_.1]  92.2,112.65 90 top
LOGO104  OSHW-LOGOS  [OSHW-LOGO-S]  96.27,107.19 270 bottom
LOGO105  SFE_LOGO_NAME_FLAME.1_INCH  [SFE_LOGO_NAME_FLAME_.1]  90.42,113.03 270 bottom
LOGO106  SFE_LOGO_FLAME.1_INCH  [SFE_LOGO_FLAME_.1]  110.49,112.65 90 top
LOGO107  OSHW-LOGOS  [OSHW-LOGO-S]  114.55,107.19 270 bottom
LOGO108  SFE_LOGO_NAME_FLAME.1_INCH  [SFE_LOGO_NAME_FLAME_.1]  108.71,113.03 270 bottom
STANDOFF1  STAND-OFF  [STAND-OFF]  22.1,22.1 0 top
STANDOFF2  STAND-OFF  [STAND-OFF]  40.39,22.1 0 top
STANDOFF3  STAND-OFF  [STAND-OFF]  58.67,22.1 0 top
STANDOFF4  STAND-OFF  [STAND-OFF]  76.96,22.1 0 top
STANDOFF5  STAND-OFF  [STAND-OFF]  95.25,22.1 0 top
STANDOFF6  STAND-OFF  [STAND-OFF]  113.54,22.1 0 top
STANDOFF7  STAND-OFF  [STAND-OFF]  22.1,40.39 0 top
STANDOFF8  STAND-OFF  [STAND-OFF]  40.39,40.39 0 top
STANDOFF9  STAND-OFF  [STAND-OFF]  58.67,40.39 0 top
STANDOFF10  STAND-OFF  [STAND-OFF]  76.96,40.39 0 top
STANDOFF11  STAND-OFF  [STAND-OFF]  95.25,40.39 0 top
STANDOFF12  STAND-OFF  [STAND-OFF]  113.54,40.39 0 top
STANDOFF13  STAND-OFF  [STAND-OFF]  22.1,58.67 0 top
STANDOFF14  STAND-OFF  [STAND-OFF]  40.39,58.67 0 top
STANDOFF15  STAND-OFF  [STAND-OFF]  58.67,58.67 0 top
STANDOFF16  STAND-OFF  [STAND-OFF]  76.96,58.67 0 top
STANDOFF17  STAND-OFF  [STAND-OFF]  95.25,58.67 0 top
STANDOFF18  STAND-OFF  [STAND-OFF]  113.54,58.67 0 top
STANDOFF19  STAND-OFF  [STAND-OFF]  22.1,76.96 0 top
STANDOFF20  STAND-OFF  [STAND-OFF]  40.39,76.96 0 top
STANDOFF21  STAND-OFF  [STAND-OFF]  58.67,76.96 0 top
STANDOFF22  STAND-OFF  [STAND-OFF]  76.96,76.96 0 top
STANDOFF23  STAND-OFF  [STAND-OFF]  95.25,76.96 0 top
STANDOFF24  STAND-OFF  [STAND-OFF]  113.54,76.96 0 top
STANDOFF25  STAND-OFF  [STAND-OFF]  22.1,95.25 0 top
STANDOFF26  STAND-OFF  [STAND-OFF]  40.39,95.25 0 top
STANDOFF27  STAND-OFF  [STAND-OFF]  58.67,95.25 0 top
STANDOFF28  STAND-OFF  [STAND-OFF]  76.96,95.25 0 top
STANDOFF29  STAND-OFF  [STAND-OFF]  95.25,95.25 0 top
STANDOFF30  STAND-OFF  [STAND-OFF]  113.54,95.25 0 top
STANDOFF31  STAND-OFF  [STAND-OFF]  22.1,113.54 0 top
STANDOFF32  STAND-OFF  [STAND-OFF]  40.39,113.54 0 top
STANDOFF33  STAND-OFF  [STAND-OFF]  58.67,113.54 0 top
STANDOFF34  STAND-OFF  [STAND-OFF]  76.96,113.54 0 top
STANDOFF35  STAND-OFF  [STAND-OFF]  95.25,113.54 0 top
STANDOFF36  STAND-OFF  [STAND-OFF]  113.54,113.54 0 top
U1  ADXL337  [LFCSP_LQ-16]  15.75,17.02 0 top
U2  ADXL337  [LFCSP_LQ-16]  34.04,17.02 0 top
U3  ADXL337  [LFCSP_LQ-16]  52.32,17.02 0 top
U4  ADXL337  [LFCSP_LQ-16]  70.61,17.02 0 top
U5  ADXL337  [LFCSP_LQ-16]  88.9,17.02 0 top
U6  ADXL337  [LFCSP_LQ-16]  107.19,17.02 0 top
U7  ADXL337  [LFCSP_LQ-16]  15.75,35.31 0 top
U8  ADXL337  [LFCSP_LQ-16]  34.04,35.31 0 top
U9  ADXL337  [LFCSP_LQ-16]  52.32,35.31 0 top
U10  ADXL337  [LFCSP_LQ-16]  70.61,35.31 0 top
U11  ADXL337  [LFCSP_LQ-16]  88.9,35.31 0 top
U12  ADXL337  [LFCSP_LQ-16]  107.19,35.31 0 top
U13  ADXL337  [LFCSP_LQ-16]  15.75,53.59 0 top
U14  ADXL337  [LFCSP_LQ-16]  34.04,53.59 0 top
U15  ADXL337  [LFCSP_LQ-16]  52.32,53.59 0 top
U16  ADXL337  [LFCSP_LQ-16]  70.61,53.59 0 top
U17  ADXL337  [LFCSP_LQ-16]  88.9,53.59 0 top
U18  ADXL337  [LFCSP_LQ-16]  107.19,53.59 0 top
U19  ADXL337  [LFCSP_LQ-16]  15.75,71.88 0 top
U20  ADXL337  [LFCSP_LQ-16]  34.04,71.88 0 top
U21  ADXL337  [LFCSP_LQ-16]  52.32,71.88 0 top
U22  ADXL337  [LFCSP_LQ-16]  70.61,71.88 0 top
U23  ADXL337  [LFCSP_LQ-16]  88.9,71.88 0 top
U24  ADXL337  [LFCSP_LQ-16]  107.19,71.88 0 top
U25  ADXL337  [LFCSP_LQ-16]  15.75,90.17 0 top
U26  ADXL337  [LFCSP_LQ-16]  34.04,90.17 0 top
U27  ADXL337  [LFCSP_LQ-16]  52.32,90.17 0 top
U28  ADXL337  [LFCSP_LQ-16]  70.61,90.17 0 top
U29  ADXL337  [LFCSP_LQ-16]  88.9,90.17 0 top
U30  ADXL337  [LFCSP_LQ-16]  107.19,90.17 0 top
U31  ADXL337  [LFCSP_LQ-16]  15.75,108.46 0 top
U32  ADXL337  [LFCSP_LQ-16]  34.04,108.46 0 top
U33  ADXL337  [LFCSP_LQ-16]  52.32,108.46 0 top
U34  ADXL337  [LFCSP_LQ-16]  70.61,108.46 0 top
U35  ADXL337  [LFCSP_LQ-16]  88.9,108.46 0 top
U36  ADXL337  [LFCSP_LQ-16]  107.19,108.46 0 top

## Library data of the parts
C1-C3 C5-C7 C9-C11 C13-C15 C17-C19 C21-C23 C25-C27 C29-C31 C33-C35 C37-C39 C41-C43 C45-C47 C49-C51 C53-C55 C57-C59 C61-C63 C65-C67 C69-C71 C73-C75 C77-C79 C81-C83 C85-C87 C89-C91 C93-C95 C97-C99 C101-C103 C105-C107 C109-C111 C113-C115 C117-C119 C121-C123 C125-C127 C129-C131 C133-C135 C137-C139 C141-C143 = SparkFun-Capacitors; PROD_ID: CAP-00867
C4 C8 C12 C16 C20 C24 C28 C32 C36 C40 C44 C48 C52 C56 C60 C64 C68 C72 C76 C80 C84 C88 C92 C96 C100 C104 C108 C112 C116 C120 C124 C128 C132 C136 C140 C144 = SparkFun-Capacitors; PROD_ID: CAP-00810
E$1 = SparkFun-Retired
E$4 E$6 FID1-FID72 LOGO1-LOGO108 = SparkFun-Aesthetics
JP1-JP36 = SparkFun-Connectors
STANDOFF1-STANDOFF36 = SparkFun-Electromechanical
U1-U36 = SparkFun-Sensors

## Nets
3.3V: C4.1 JP1.2 U1.14 U1.15
3.3V1: C8.1 JP2.2 U2.14 U2.15
3.3V2: C12.1 JP3.2 U3.14 U3.15
3.3V3: C16.1 JP4.2 U4.14 U4.15
3.3V4: C20.1 JP5.2 U5.14 U5.15
3.3V5: C24.1 JP6.2 U6.14 U6.15
3.3V6: C28.1 JP7.2 U7.14 U7.15
3.3V7: C32.1 JP8.2 U8.14 U8.15
3.3V8: C36.1 JP9.2 U9.14 U9.15
3.3V9: C40.1 JP10.2 U10.14 U10.15
3.3V10: C44.1 JP11.2 U11.14 U11.15
3.3V11: C48.1 JP12.2 U12.14 U12.15
3.3V12: C52.1 JP13.2 U13.14 U13.15
3.3V13: C56.1 JP14.2 U14.14 U14.15
3.3V14: C60.1 JP15.2 U15.14 U15.15
3.3V15: C64.1 JP16.2 U16.14 U16.15
3.3V16: C68.1 JP17.2 U17.14 U17.15
3.3V17: C72.1 JP18.2 U18.14 U18.15
3.3V18: C76.1 JP19.2 U19.14 U19.15
3.3V19: C80.1 JP20.2 U20.14 U20.15
3.3V20: C84.1 JP21.2 U21.14 U21.15
3.3V21: C88.1 JP22.2 U22.14 U22.15
3.3V22: C92.1 JP23.2 U23.14 U23.15
3.3V23: C96.1 JP24.2 U24.14 U24.15
3.3V24: C100.1 JP25.2 U25.14 U25.15
3.3V25: C104.1 JP26.2 U26.14 U26.15
3.3V26: C108.1 JP27.2 U27.14 U27.15
3.3V27: C112.1 JP28.2 U28.14 U28.15
3.3V28: C116.1 JP29.2 U29.14 U29.15
3.3V29: C120.1 JP30.2 U30.14 U30.15
3.3V30: C124.1 JP31.2 U31.14 U31.15
3.3V31: C128.1 JP32.2 U32.14 U32.15
3.3V32: C132.1 JP33.2 U33.14 U33.15
3.3V33: C136.1 JP34.2 U34.14 U34.15
3.3V34: C140.1 JP35.2 U35.14 U35.15
3.3V35: C144.1 JP36.2 U36.14 U36.15
GND: C1.2 C2.2 C3.2 C4.2 JP1.1 U1.6 U1.7
GND1: C5.2 C6.2 C7.2 C8.2 JP2.1 U2.6 U2.7
GND2: C9.2 C10.2 C11.2 C12.2 JP3.1 U3.6 U3.7
GND3: C13.2 C14.2 C15.2 C16.2 JP4.1 U4.6 U4.7
GND4: C17.2 C18.2 C19.2 C20.2 JP5.1 U5.6 U5.7
GND5: C21.2 C22.2 C23.2 C24.2 JP6.1 U6.6 U6.7
GND6: C25.2 C26.2 C27.2 C28.2 JP7.1 U7.6 U7.7
GND7: C29.2 C30.2 C31.2 C32.2 JP8.1 U8.6 U8.7
GND8: C33.2 C34.2 C35.2 C36.2 JP9.1 U9.6 U9.7
GND9: C37.2 C38.2 C39.2 C40.2 JP10.1 U10.6 U10.7
GND10: C41.2 C42.2 C43.2 C44.2 JP11.1 U11.6 U11.7
GND11: C45.2 C46.2 C47.2 C48.2 JP12.1 U12.6 U12.7
GND12: C49.2 C50.2 C51.2 C52.2 JP13.1 U13.6 U13.7
GND13: C53.2 C54.2 C55.2 C56.2 JP14.1 U14.6 U14.7
GND14: C57.2 C58.2 C59.2 C60.2 JP15.1 U15.6 U15.7
GND15: C61.2 C62.2 C63.2 C64.2 JP16.1 U16.6 U16.7
GND16: C65.2 C66.2 C67.2 C68.2 JP17.1 U17.6 U17.7
GND17: C69.2 C70.2 C71.2 C72.2 JP18.1 U18.6 U18.7
GND18: C73.2 C74.2 C75.2 C76.2 JP19.1 U19.6 U19.7
GND19: C77.2 C78.2 C79.2 C80.2 JP20.1 U20.6 U20.7
GND20: C81.2 C82.2 C83.2 C84.2 JP21.1 U21.6 U21.7
GND21: C85.2 C86.2 C87.2 C88.2 JP22.1 U22.6 U22.7
GND22: C89.2 C90.2 C91.2 C92.2 JP23.1 U23.6 U23.7
GND23: C93.2 C94.2 C95.2 C96.2 JP24.1 U24.6 U24.7
GND24: C97.2 C98.2 C99.2 C100.2 JP25.1 U25.6 U25.7
GND25: C101.2 C102.2 C103.2 C104.2 JP26.1 U26.6 U26.7
GND26: C105.2 C106.2 C107.2 C108.2 JP27.1 U27.6 U27.7
GND27: C109.2 C110.2 C111.2 C112.2 JP28.1 U28.6 U28.7
GND28: C113.2 C114.2 C115.2 C116.2 JP29.1 U29.6 U29.7
GND29: C117.2 C118.2 C119.2 C120.2 JP30.1 U30.6 U30.7
GND30: C121.2 C122.2 C123.2 C124.2 JP31.1 U31.6 U31.7
GND31: C125.2 C126.2 C127.2 C128.2 JP32.1 U32.6 U32.7
GND32: C129.2 C130.2 C131.2 C132.2 JP33.1 U33.6 U33.7
GND33: C133.2 C134.2 C135.2 C136.2 JP34.1 U34.6 U34.7
GND34: C137.2 C138.2 C139.2 C140.2 JP35.1 U35.6 U35.7
GND35: C141.2 C142.2 C143.2 C144.2 JP36.1 U36.6 U36.7
ST: JP1.6 U1.2
ST1: JP2.6 U2.2
ST2: JP3.6 U3.2
ST3: JP4.6 U4.2
ST4: JP5.6 U5.2
ST5: JP6.6 U6.2
ST6: JP7.6 U7.2
ST7: JP8.6 U8.2
ST8: JP9.6 U9.2
ST9: JP10.6 U10.2
ST10: JP11.6 U11.2
ST11: JP12.6 U12.2
ST12: JP13.6 U13.2
ST13: JP14.6 U14.2
ST14: JP15.6 U15.2
ST15: JP16.6 U16.2
ST16: JP17.6 U17.2
ST17: JP18.6 U18.2
ST18: JP19.6 U19.2
ST19: JP20.6 U20.2
ST20: JP21.6 U21.2
ST21: JP22.6 U22.2
ST22: JP23.6 U23.2
ST23: JP24.6 U24.2
ST24: JP25.6 U25.2
ST25: JP26.6 U26.2
ST26: JP27.6 U27.2
ST27: JP28.6 U28.2
ST28: JP29.6 U29.2
ST29: JP30.6 U30.2
ST30: JP31.6 U31.2
ST31: JP32.6 U32.2
ST32: JP33.6 U33.2
ST33: JP34.6 U34.2
ST34: JP35.6 U35.2
ST35: JP36.6 U36.2
X: C1.1 JP1.3 U1.5
X1: C5.1 JP2.3 U2.5
X2: C9.1 JP3.3 U3.5
X3: C13.1 JP4.3 U4.5
X4: C17.1 JP5.3 U5.5
X5: C21.1 JP6.3 U6.5
X6: C25.1 JP7.3 U7.5
X7: C29.1 JP8.3 U8.5
X8: C33.1 JP9.3 U9.5
X9: C37.1 JP10.3 U10.5
X10: C41.1 JP11.3 U11.5
X11: C45.1 JP12.3 U12.5
X12: C49.1 JP13.3 U13.5
X13: C53.1 JP14.3 U14.5
X14: C57.1 JP15.3 U15.5
X15: C61.1 JP16.3 U16.5
X16: C65.1 JP17.3 U17.5
X17: C69.1 JP18.3 U18.5
X18: C73.1 JP19.3 U19.5
X19: C77.1 JP20.3 U20.5
X20: C81.1 JP21.3 U21.5
X21: C85.1 JP22.3 U22.5
X22: C89.1 JP23.3 U23.5
X23: C93.1 JP24.3 U24.5
X24: C97.1 JP25.3 U25.5
X25: C101.1 JP26.3 U26.5
X26: C105.1 JP27.3 U27.5
X27: C109.1 JP28.3 U28.5
X28: C113.1 JP29.3 U29.5
X29: C117.1 JP30.3 U30.5
X30: C121.1 JP31.3 U31.5
X31: C125.1 JP32.3 U32.5
X32: C129.1 JP33.3 U33.5
X33: C133.1 JP34.3 U34.5
X34: C137.1 JP35.3 U35.5
X35: C141.1 JP36.3 U36.5
Y: C2.1 JP1.4 U1.4
Y1: C6.1 JP2.4 U2.4
Y2: C10.1 JP3.4 U3.4
Y3: C14.1 JP4.4 U4.4
Y4: C18.1 JP5.4 U5.4
Y5: C22.1 JP6.4 U6.4
Y6: C26.1 JP7.4 U7.4
Y7: C30.1 JP8.4 U8.4
Y8: C34.1 JP9.4 U9.4
Y9: C38.1 JP10.4 U10.4
Y10: C42.1 JP11.4 U11.4
Y11: C46.1 JP12.4 U12.4
Y12: C50.1 JP13.4 U13.4
Y13: C54.1 JP14.4 U14.4
Y14: C58.1 JP15.4 U15.4
Y15: C62.1 JP16.4 U16.4
Y16: C66.1 JP17.4 U17.4
Y17: C70.1 JP18.4 U18.4
Y18: C74.1 JP19.4 U19.4
Y19: C78.1 JP20.4 U20.4
Y20: C82.1 JP21.4 U21.4
Y21: C86.1 JP22.4 U22.4
Y22: C90.1 JP23.4 U23.4
Y23: C94.1 JP24.4 U24.4
Y24: C98.1 JP25.4 U25.4
Y25: C102.1 JP26.4 U26.4
Y26: C106.1 JP27.4 U27.4
Y27: C110.1 JP28.4 U28.4
Y28: C114.1 JP29.4 U29.4
Y29: C118.1 JP30.4 U30.4
Y30: C122.1 JP31.4 U31.4
Y31: C126.1 JP32.4 U32.4
Y32: C130.1 JP33.4 U33.4
Y33: C134.1 JP34.4 U34.4
Y34: C138.1 JP35.4 U35.4
Y35: C142.1 JP36.4 U36.4
Z: C3.1 JP1.5 U1.16
Z1: C7.1 JP2.5 U2.16
Z2: C11.1 JP3.5 U3.16
Z3: C15.1 JP4.5 U4.16
Z4: C19.1 JP5.5 U5.16
Z5: C23.1 JP6.5 U6.16
Z6: C27.1 JP7.5 U7.16
Z7: C31.1 JP8.5 U8.16
Z8: C35.1 JP9.5 U9.16
Z9: C39.1 JP10.5 U10.16
Z10: C43.1 JP11.5 U11.16
Z11: C47.1 JP12.5 U12.16
Z12: C51.1 JP13.5 U13.16
Z13: C55.1 JP14.5 U14.16
Z14: C59.1 JP15.5 U15.16
Z15: C63.1 JP16.5 U16.16
Z16: C67.1 JP17.5 U17.16
Z17: C71.1 JP18.5 U18.16
Z18: C75.1 JP19.5 U19.16
Z19: C79.1 JP20.5 U20.16
Z20: C83.1 JP21.5 U21.16
Z21: C87.1 JP22.5 U22.16
Z22: C91.1 JP23.5 U23.16
Z23: C95.1 JP24.5 U24.16
Z24: C99.1 JP25.5 U25.16
Z25: C103.1 JP26.5 U26.16
Z26: C107.1 JP27.5 U27.16
Z27: C111.1 JP28.5 U28.16
Z28: C115.1 JP29.5 U29.16
Z29: C119.1 JP30.5 U30.16
Z30: C123.1 JP31.5 U31.16
Z31: C127.1 JP32.5 U32.16
Z32: C131.1 JP33.5 U33.16
Z33: C135.1 JP34.5 U34.16
Z34: C139.1 JP35.5 U35.16
Z35: C143.1 JP36.5 U36.16